# EAGLE board charging_1batt (EAGLE 8.2.0)
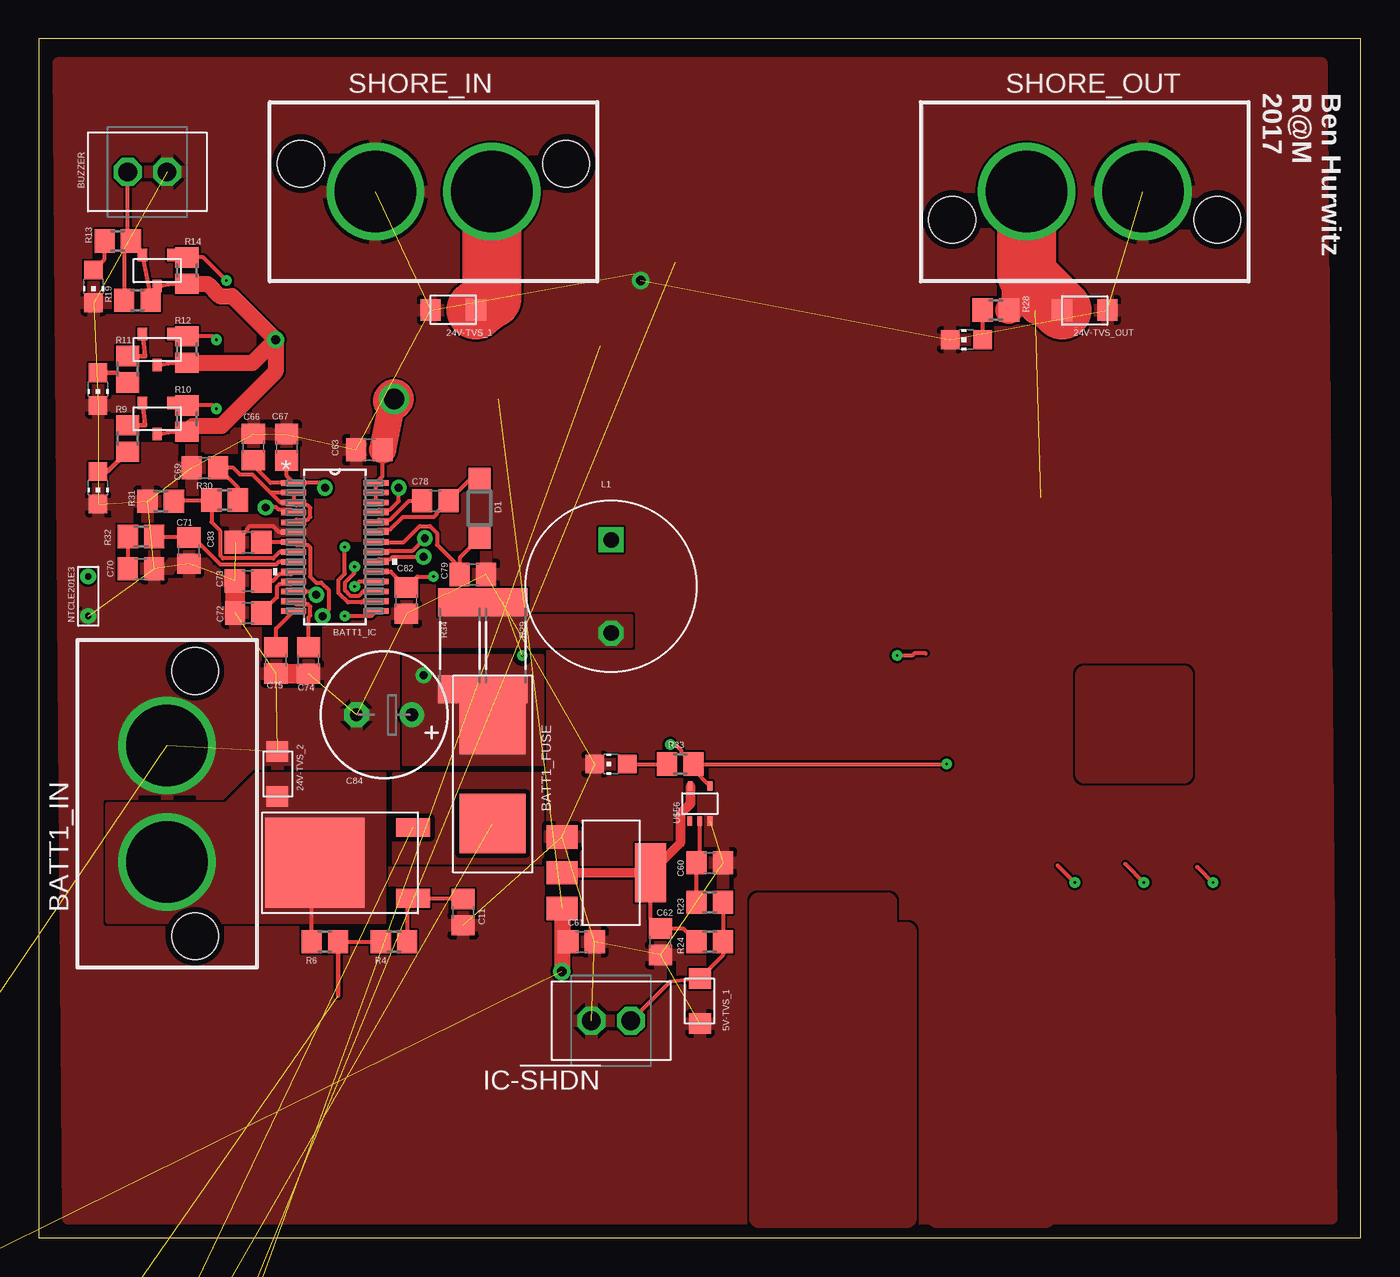
[diagram p0: board, top side]
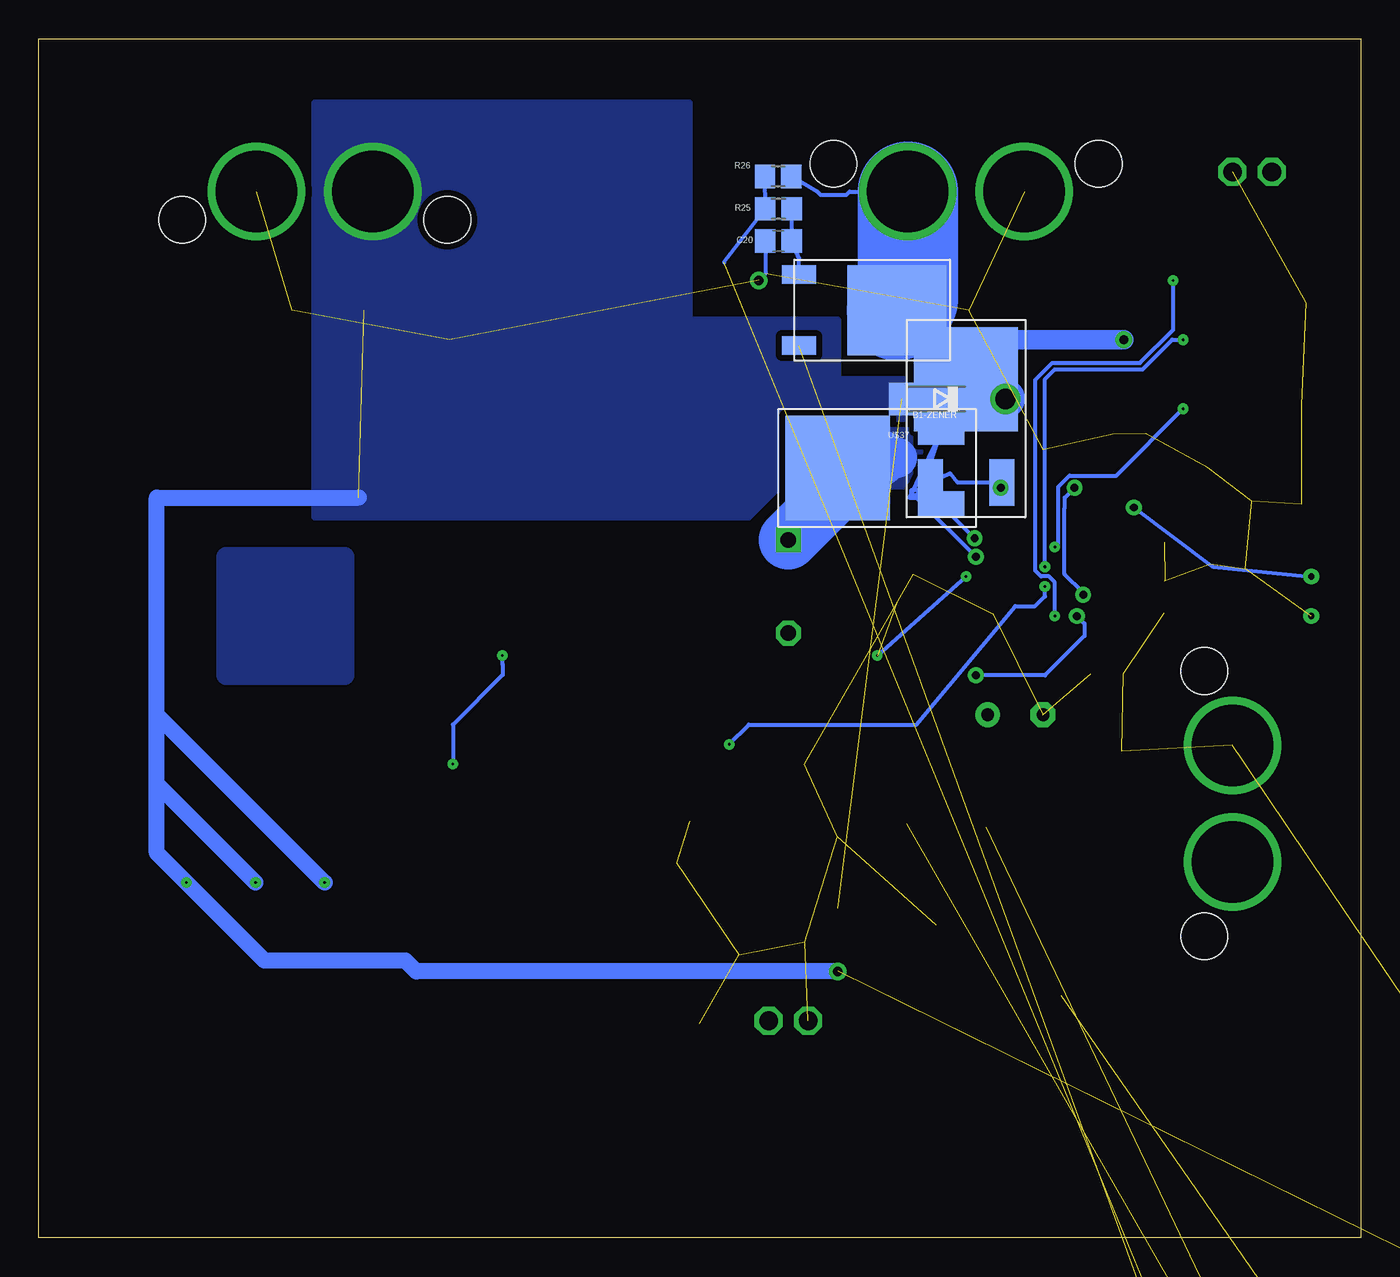
[diagram p1: board, bottom side, seen from below]

Size 85.07 x 77.14 mm. Coordinates in mm from the lower left corner, seen from the top.
Outline: 0,0 85.07,0 85.07,77.14 0,77.14 0,0
Copper layers (1*16): Top 0.0356mm / dielectric 1.5011mm / Bottom 0.0356mm
Design rules "OshPark *": minimum track width 6mil, minimum drill 7mil, track to track 6mil, track to pad 6mil, pad to pad 6mil, via to via 6mil, smd to smd 6mil, copper to edge 15mil, drill to drill 6mil, minimum pad ring 12mil, minimum via ring 10mil, stop-mask expansion 6mil, vias tented up to drill 0mil, thermal gap 10mil

## Footprints (pad centres in the part's own frame; a part is rotated, then mirrored left to right if it is on the bottom)
DO-219AB = smd 1.3 x 1.4: P$1 -1.45,0; P$2 1.45,0
DPAK = smd 3 x 1.6: 1 1.57,-2.3; 3 1.57,2.3 | smd 6.7 x 6.7: TAB -5.08,0
SOD106-R = smd 1.6 x 2.1: A 2.25,0; C -2.25,0
154-OMNI-BLOK = smd 3.81 x 4.242: P$1 -3.188,0; P$2 3.188,0
QSOP28 = smd 1.6 x 0.356: 1 -2.654,4.128; 2 -2.654,3.493; 3 -2.654,2.857; 4 -2.654,2.223; 5 -2.654,1.587; 6 -2.654,0.953; 7 -2.654,0.318; 8 -2.654,-0.318; 9 -2.654,-0.953; 10 -2.654,-1.587; 11 -2.654,-2.223; 12 -2.654,-2.857; 13 -2.654,-3.493; 14 -2.654,-4.128; 15 2.654,-4.128; 16 2.654,-3.493; 17 2.654,-2.857; 18 2.654,-2.223; 19 2.654,-1.587; 20 2.654,-0.953; 21 2.654,-0.318; 22 2.654,0.318; 23 2.654,0.953; 24 2.654,1.587; 25 2.654,2.223; 26 2.654,2.857; 27 2.654,3.493; 28 2.654,4.128
SUPERSABRE_2CIRCUIT = drill 5.25: P$1 -3.747,0; P$2 3.747,0 | hole 2.997: -8.534,-1.803; 8.534,-1.803
1X02 = drill 1.016: 1 -1.27,0; 2 1.27,0
KK254_VERT_2PIN = drill 1.2 octagon: P$1 1.27,0; P$2 -1.27,0
C0805 = smd 1.3 x 1.5: 1 -0.85,0; 2 0.85,0
E3,5-8 = drill 0.813 pad 1.6: + -1.778,0 | drill 0.813 pad 1.6 octagon: - 1.778,0
SOD123 = smd 1.4 x 1.4: A 1.9,0; C -1.9,0
L6100 = drill 1 square: P$1 -3,0 | drill 1 octagon: P$2 3,0
CHIP-LED0805 = smd 1.2 x 1.2: A 0,-1.05; C 0,1.05
R0805 = smd 1.3 x 1.5: 1 -0.85,0; 2 0.85,0
R2512 = smd 1.8 x 3.2: 1 -2.8,0; 2 2.8,0
SOT-346-3/S-MINI = smd 0.6 x 0.8: P$1 -0.95,-1; P$2 0.95,-1; P$3 0,1
TO252-3 = smd 1.2 x 2.2: 1 -2.28,-6.3; 3 2.28,-6.3 | smd 5.8 x 6.4: TAB 0,0
2-0.3MM-LEADS = drill 0.4: P$1 -1.27,0; P$2 1.27,0
TSSOP5 = smd 0.3 x 0.6: P$1 -0.65,-1.125; P$2 0,-1.125; P$3 0.65,-1.125; P$4 0.65,1.125; P$5 -0.62,1.125
SOT-223 = smd 1.5 x 2: P$1 -2.3,-3.15; P$2 0,-3.15; P$3 2.3,-3.15 | smd 3.8 x 2: P$4 0,2.54

## Placement (x,y rotation side)
5V-TVS_1  VTVS  [DO-219AB]  42.55,15.24 90 top
24V-TVS_1  VTVS  [DO-219AB]  26.67,59.69 0 top
24V-TVS_2  VTVS  [DO-219AB]  15.35,29.84 270 top
24V-TVS_OUT  VTVS  [DO-219AB]  67.31,59.69 180 top
B1-HFET  STD95N2LH5  [DPAK]  25.4,50.17 270 bottom
B1-ZENER  [SOD106-R]  27.31,53.98 180 bottom
BATT1_FUSE  4A  [154-OMNI-BLOK]  29.21,29.84 90 top
BATT1_IC  MAX1737  [QSOP28]  19.05,44.45 0 top
BATT1_IN  2_SUPERSABRE  [SUPERSABRE_2CIRCUIT]  8.26,27.94 90 top
BATT_ON/OFF  [1X02]  -13.33,-33.02 0 top  (outside the outline)
BUZZER  KK254_VERT_2PIN22-29-2021  [KK254_VERT_2PIN]  6.99,68.58 180 top
C1  10u  [C0805]  -20.95,-10.16 0 top  (outside the outline)
C2  0.1u  [C0805]  -20.95,-15.87 0 top  (outside the outline)
C3  1n  [C0805]  -20.95,-21.59 0 top  (outside the outline)
C11  2.2u  [C0805]  27.31,20.95 270 top
C20  2.2u  [C0805]  37.47,64.14 180 bottom
C60  1u  [C0805]  43.18,24.13 0 top
C61  10u  [C0805]  34.92,19.05 0 top
C62  10u  [C0805]  40,19.05 270 top
C63  0.1u  [C0805]  21.27,50.71 180 top
C66  2.2u  [C0805]  13.82,50.89 90 top
C67  2.2u  [C0805]  15.95,50.86 90 top
C69  1u  [C0805]  10.69,49.55 180 top
C70  0.1u  [C0805]  6.57,43.05 0 top
C71  1n  [C0805]  9.66,44.21 270 top
C72  47n  [C0805]  13.48,40.21 180 top
C73  47n  [C0805]  13.47,42.27 180 top
C74  1n  [C0805]  17.36,37.14 270 top
C75  1n  [C0805]  15.27,37.15 270 top
C78  0.1u  [C0805]  25.52,47.42 0 top
C79  0.1u  [C0805]  27.93,42.69 0 top
C82  0.1u  [C0805]  23.66,41 270 top
C83  0.1u  [C0805]  13.47,44.75 180 top
C84  120u  [E3,5-8]  22.22,33.66 180 top
CHARGE-CURRENT  [1X02]  -13.33,-49.53 0 top  (outside the outline)
D1  [SOD123]  28.37,46.94 270 top
IC-!SHDN!  KK254_VERT_2PIN22-29-2021  [KK254_VERT_2PIN]  36.83,13.97 0 top
L1  10uH  [L6100]  36.83,41.91 270 top
LED1  FASTCHG  [CHIP-LED0805]  3.81,48.26 180 top
LED2  FULLCHG  [CHIP-LED0805]  3.81,54.61 180 top
LED3  FAULT  [CHIP-LED0805]  3.52,61.21 180 top
LED7  Shore Power  [CHIP-LED0805]  59.69,57.78 90 top
LED8  CHARGING  [CHIP-LED0805]  36.83,30.48 90 top
R4  43k  [R0805]  22.86,19.05 180 top
R6  4.3k  [R0805]  18.42,19.05 0 top
R9  1.2k  [R0805]  5.71,51.44 90 top
R10  50k  [R0805]  9.53,52.7 270 top
R11  1.2k  [R0805]  5.71,55.88 90 top
R12  50k  [R0805]  9.53,57.15 270 top
R13  510  [R0805]  5.08,64.14 0 top
R14  50k  [R0805]  9.53,62.23 270 top
R19  680  [R0805]  6.35,60.33 0 top
R23  510  [R0805]  43.18,21.59 180 top
R24  6.8k  [R0805]  43.18,19.05 180 top
R25  43k  [R0805]  37.47,66.21 180 bottom
R26  4.3k  [R0805]  37.49,68.29 180 bottom
R28  1.5k  [R0805]  61.59,59.69 0 top
R29  100m  [R2512]  29.85,38.1 90 top
R30  ~50k  [R0805]  11.96,47.47 180 top
R31  ~50k  [R0805]  7.84,47.4 0 top
R32  10k  [R0805]  6.58,45.13 0 top
R33  330  [R0805]  41.28,30.48 0 top
R34  100m  [R2512]  27.31,38.1 90 top
SHORE_CURR  [1X02]  -13.33,-82.55 0 top  (outside the outline)
SHORE_IN  2_SUPERSABRE  [SUPERSABRE_2CIRCUIT]  25.4,67.31 180 top
SHORE_ON/OFF  [1X02]  -13.33,-66.04 0 top  (outside the outline)
SHORE_OUT  2_SUPERSABRE  [SUPERSABRE_2CIRCUIT]  67.31,67.31 0 top
U$7  SSM3J353F  [SOT-346-3/S-MINI]  7.62,52.7 180 top
U$8  SSM3J353F  [SOT-346-3/S-MINI]  7.62,57.15 180 top
U$9  SSM3J353F  [SOT-346-3/S-MINI]  7.62,62.23 180 top
U$16  IPD50P04P4-13  [TO252-3]  17.78,24.13 90 top
U$19  IPD50P04P4-13  [TO252-3]  29.85,59.69 270 bottom
U$37  STD95N2LH5  [DPAK]  28.57,49.53 0 bottom
U$40  NTCLE201E3  [2-0.3MM-LEADS]  3.18,41.27 270 top
U$56  74LVC1G14  [TSSOP5]  42.55,27.94 0 top
U$57  NCP1117  [SOT-223]  36.83,23.5 270 top

## Library data of the parts
5V-TVS_1 24V-TVS_1 24V-TVS_2 24V-TVS_OUT B1-ZENER D1 = diode
B1-HFET U$7-U$9 U$37 = transistors
BATT1_FUSE = littelfuse
BATT1_IC = maxim
BATT1_IN BUZZER IC-!SHDN! SHORE_IN SHORE_OUT = molex
BATT_ON/OFF CHARGE-CURRENT SHORE_CURR SHORE_ON/OFF = pinhead
C1-C3 C11 C20 C60-C63 C66 C67 C69-C75 C78 C79 C82-C84 L1 R4 R6 R9-R14 R19 R23-R26 R28-R34 = resistor
LED1-LED3 LED7 LED8 = led
U$16 U$19 = transistor-power
U$40 = vishay
U$56 = NXP
U$57 = ONSemi

## Nets
!SHDN!: BATT1_IC.18 R33.2 U$56.P$4
BATT1_P: 24V-TVS_2.P$2 BATT1_IN.P$1 R6.1 U$16.TAB
BATT_1: BATT1_FUSE.P$2 BATT1_IC.7 C83.1 C84.+ R29.1 R34.1
CS_1: BATT1_IC.19 C82.1 L1.P$2 R29.2 R34.2
FET-G_1: C11.1 R4.1 U$16.1
GND: 5V-TVS_1.P$1 24V-TVS_1.P$1 24V-TVS_2.P$1 24V-TVS_OUT.P$1 BATT1_IC.6 BATT1_IN.P$2 BATT_ON/OFF.2 BUZZER.P$2 C1.2 C2.2 C3.2 C11.2 C20.2 C60.2 C61.2 C62.2 C63.2 C66.2 C67.2 C69.2 C70.2 C71.2 C72.2 C73.2 C74.2 C75.2 C79.2 C82.2 C83.2 C84.- IC-!SHDN!.P$2 LED1.C LED2.C LED3.C LED7.C LED8.C R31.1 SHORE_IN.P$2 SHORE_ON/OFF.1 SHORE_OUT.P$2 U$40.P$2 U$56.P$3 U$57.P$1
N$1: CHARGE-CURRENT.2 U$16.3
N$2: LED1.A R9.1
N$3: BATT1_FUSE.P$1 CHARGE-CURRENT.1
N$4: SHORE_CURR.1 U$19.3
N$12: LED3.A R13.1
N$22: LED2.A R11.1
N$23: R9.2 U$7.P$2
N$24: BATT1_IC.16 R10.1 U$7.P$1
N$26: R11.2 U$8.P$2
N$27: BATT1_IC.17 R12.1 U$8.P$1
N$29: BUZZER.P$1 R13.2 R19.1
N$30: R19.2 U$9.P$2
N$31: BATT1_IC.15 R14.1 U$9.P$1
N$35: LED7.A R28.1
N$40: B1-HFET.TAB B1-ZENER.C BATT1_IC.26 BATT1_IC.27 BATT1_IC.28 C63.1
N$47: C20.1 R25.1 U$19.1
N$49: C60.1 R23.2 U$56.P$2
N$50: 5V-TVS_1.P$2 IC-!SHDN!.P$1 R23.1 R24.1
N$51: R25.2 R26.2 SHORE_ON/OFF.2
N$52: BATT_ON/OFF.1 R4.2 R6.2
N$54: C62.1 R24.2 U$56.P$5 U$57.P$2 U$57.P$4
N$57: LED8.A R33.1
N$62: BATT1_IC.8 R30.2 R31.2
N$64: C70.1 R32.1
N$65: BATT1_IC.1 BATT1_IC.12 C66.1 C67.1
N$67: BATT1_IC.9 C71.1 R32.2
N$68: BATT1_IC.2 BATT1_IC.3 BATT1_IC.5 C69.1 R30.1
N$69: BATT1_IC.11 C72.1
N$70: BATT1_IC.10 C73.1
N$71: BATT1_IC.13 C74.1
N$72: BATT1_IC.14 C75.1
N$75: BATT1_IC.24 C78.1
N$76: BATT1_IC.23 C78.2 D1.C
N$79: BATT1_IC.21 U$37.1
N$80: B1-HFET.1 BATT1_IC.25
N$81: B1-HFET.3 L1.P$1 U$37.TAB
N$82: BATT1_IC.20 U$37.3
N$83: BATT1_IC.22 C79.1 D1.A
N$84: BATT1_IC.4 U$40.P$1
V_SHORE: 24V-TVS_OUT.P$2 B1-ZENER.A C1.1 C2.1 C3.1 C61.1 R10.2 R12.2 R14.2 R28.2 SHORE_CURR.2 SHORE_OUT.P$1 U$7.P$3 U$8.P$3 U$9.P$3 U$57.P$3
VIN: 24V-TVS_1.P$2 R26.1 SHORE_IN.P$1 U$19.TAB

## Tracks (layer width: path | path; a pad name or v marks a point on that pad's centre or on a via)
!SHDN!  (via drill 0.18)
  Top 0.254: U$56.P$4 42.12,30.14 R33.2 | 57.09,37.61 56.35,37.61 56.21,37.47 v55.25,37.47 | R33.2 v58.42,30.48 | R33.2 41.35,31.25 41.35,31.35 40.95,31.75 v40.64,31.75 | 20.97,42.23 BATT1_IC.18 20.64,42.23 v20.32,41.91
  Bottom 0.254: v55.25,37.47 55.25,36.91 55.22,36.89 55.22,36.22 58.42,33.02 v58.42,30.48 | v40.64,31.75 39.37,33.02 28.57,33.02 22.22,40.64 20.96,40.64 20.32,41.27 v20.32,41.91
BATT1_P
  Top 0.254: R6.1 17.57,23.91 U$16.TAB
  pour Top (isolate 0.305, no thermals): 4.45,27.94 12.07,27.94 13.97,29.84 22.22,29.84 22.22,20.32 4.45,20.32
BATT2_P
  pour Top (isolate 0.305): 46.36,21.59 54.61,21.59 54.61,19.69 55.88,19.69 55.88,1.27 46.36,1.27
BATT_1  (via drill 0.51)
  Top 0.254: 14.5,44.77 C83.1 14.34,44.77 BATT1_IC.7 | 15.66,44.77 BATT1_IC.7 | BATT1_IC.7 16.57,44.59 17.31,44.59 17.47,44.43 17.47,42.57 17.45,42.55 17.83,42.16 18.18,42.16 18.64,41.7 18.64,40.39 v18.26,40.01
  Bottom 0.254: v18.26,40.01 17.78,39.52 17.78,38.73 20.32,36.2 v24.77,36.2
  pour Top (isolate 0.305, no thermals): 23.5,37.47 32.39,37.47 32.39,30.48 23.5,30.48
CS_1  (via drill 0.18)  (1 unrouted)
  Top 0.254: BATT1_IC.19 22.65,42.86 C82.1 24.36,42.55 v25.4,42.55
  Top 1.27: L1.P$2 36.79,38.95
  Bottom 0.254: v25.4,42.55 v31.11,37.47
  pour Top (isolate 0.305, no thermals): 26.04,38.1 38.1,38.1 38.1,40.01 26.04,40.01
CS_2
  pour Top (isolate 0.305): 67.31,29.84 67.31,36.2 73.66,36.2 73.66,29.84
FET-D_1
  pour Top (isolate 0.305): 22.86,29.84 32.39,29.84 32.39,24.13 22.86,24.13
FET-G_1
  Top 0.254: 23.71,21.48 R4.1 | 23.71,21.48 U$16.1 | C11.1 24.04,21.8 23.71,21.48
GND  (via drill 0.6)  (39 unrouted)
  Top 0.254: BATT1_IC.6 15.47,45.4 15.09,45.78 13.56,45.78 13.39,45.62 13.39,45.52 C83.2
  Top 1.27: C74.2 C75.2 | C72.2 C73.2
  Bottom 0.254: C20.2 38.31,62.02 v38.73,61.59
  pour Top (isolate 0, rank 6): 1.91,1.27 83.19,1.27 82.55,75.56 1.27,75.56
  pour Top (isolate 0.305): 57.78,1.27 57.78,17.15 64.77,17.15 64.77,1.27
  pour Top (no thermals): 13.97,34.93 16.51,34.93 16.51,30.48 13.97,30.48
  pour Top (isolate 0.305, no thermals): 16.51,30.48 12.07,30.48 10.16,28.58 4.45,28.58 3.18,29.84 3.18,40.64 8.26,40.64 8.26,35.56 8.89,34.93 16.51,34.93
L-IN_2
  pour Bottom: 65.41,43.81 73.02,43.81 73.02,36.2 65.41,36.2
N$1  (1 unrouted)
N$2
  Top 0.305: LED1.A 4.44,49.31 R9.1
N$3  (1 unrouted)
N$4  (1 unrouted)
N$12
  Top 0.254: LED3.A 4.23,62.97 R13.1
N$22
  Top 0.305: LED2.A 5.09,55.66 R11.1
N$23
  Top 0.305: R9.2 6.85,52.28 U$7.P$2
N$24  (via drill 0.18)
  Top 0.254: U$7.P$1 8.6,53.56 R10.1 11.21,53.56 v11.43,53.34 | BATT1_IC.16 20.82,40.96 20.75,40.88 19.89,40.88 19.29,41.48 19.29,42.34 19.68,42.73 v19.68,44.45
  Bottom 0.254: v19.68,44.45 19.47,44.67 19.47,48.32 18.74,49.05 15.72,49.05 v11.43,53.34
N$26
  Top 0.305: R11.2 6.85,56.73 U$8.P$2
N$27  (via drill 0.18)
  Top 0.254: U$8.P$1 8.6,58 R12.1 11.21,58 v11.43,57.78 | BATT1_IC.17 20.88,41.59 20.58,41.29 20.06,41.29 19.7,41.65 19.7,42.17 20.32,42.79 v20.32,43.18
  Bottom 0.254: v20.32,43.18 20.32,55.25 19.68,55.88 14.03,55.88 12.12,57.78 v11.43,57.78
N$29
  Top 0.254: R19.1 5.5,63.7 R13.2 5.71,64.35 BUZZER.P$1
N$30
  Top 0.254: R19.2 7.27,60.39 U$9.P$2
N$31  (via drill 0.18)
  Top 0.254: U$9.P$1 8.6,63.08 R14.1 10.58,63.08 v12.07,61.59 | BATT1_IC.15 21.39,40.01 v19.68,40.01
  Bottom 0.254: v19.68,40.01 19.68,42.18 20.06,42.56 20.58,42.56 20.94,42.92 20.94,55.2 19.85,56.29 14.2,56.29 12.07,58.42 v12.07,61.59
N$35
  Top 0.254: LED7.A R28.1
N$40  (via drill 1.3)
  Top 0.254: C63.1 22.12,49 BATT1_IC.28 BATT1_IC.27 BATT1_IC.26
  Top 1.778: C63.1 22.76,53.87
  Top 2.54: 22.76,53.87 v22.86,53.98
  Bottom 2.54: B1-HFET.TAB 24.72,53.64 B1-ZENER.C v22.86,53.98
N$47
  Bottom 0.254: U$19.1 36.14,63.03 C20.1 R25.1
N$49
  Top 0.254: R23.2 C60.1 | 42.33,24.5 C60.1 | C60.1 42.55,24.34 U$56.P$2
N$50
  Top 0.254: R23.1 R24.1 44.03,18.18 5V-TVS_1.P$2 40.64,16.51 IC-!SHDN!.P$1
N$51  (1 unrouted)
  Bottom 0.254: R26.2 R25.2 40.97,62.75
N$52  (1 unrouted)
  Top 0.254: R6.2 R4.2
  Top 0.305: 19.27,15.57 R6.2
N$54
  Top 0.254: R24.2 41.48,19.9 C62.1 39.37,20.54 U$57.P$4
  Top 0.61: U$57.P$2 U$57.P$4 41.29,25.41 41.29,27.3 41.92,27.94 U$56.P$5
N$57
  Top 0.254: LED8.A R33.1
N$62
  Top 0.254: BATT1_IC.8 15.5,44.13 15.09,43.72 11.86,43.72 11.69,43.89 11.69,45.46 11.11,46.04 R30.2 8.76,47.47 R31.2
N$64
  Top 0.254: R32.1 5.73,43.06 C70.1
N$65  (via drill 0.51)
  Top 0.254: BATT1_IC.1 14.9,48.58 13.82,49.67 C66.1 | BATT1_IC.1 15.95,49.02 C67.1 | BATT1_IC.12 17.64,41.59 v17.86,41.38 | v18.42,48.26 18.1,48.58 BATT1_IC.1
  Bottom 0.254: v17.86,41.38 17.86,41.51 19.06,42.71 19.06,46.95 19.05,46.96 19.05,47.62 v18.42,48.26
N$67
  Top 0.254: 16.29,43.4 BATT1_IC.9 15.44,43.5 15.26,43.32 11.69,43.32 9.94,45.06 | C71.1 7.5,45.06 R32.2 | 9.94,45.06 C71.1 | 9.94,45.06 C71.1
N$68
  Top 0.254: 14.92,47.94 BATT1_IC.2 BATT1_IC.3 | BATT1_IC.3 15.56,47.31 14.92,47.94 | BATT1_IC.5 16.57,46.22 17.31,46.22 17.47,46.38 17.47,46.97 17.31,47.13 16.57,47.13 BATT1_IC.3 | 14.92,47.94 13.76,49.11 12.95,49.11 12.51,49.55 C69.1 12.81,48.28 R30.1
N$69
  Top 0.254: BATT1_IC.11 16.22,42.05 15.48,42.05 15.32,41.89 15.32,41.2 C72.1
N$70
  Top 0.254: BATT1_IC.10 16.22,42.69 15.48,42.69 15.06,42.27 C73.1
N$71
  Top 0.254: BATT1_IC.13 16.57,40.78 17.31,40.78 17.47,40.62 17.47,40.03 17.36,39.92 C74.1
N$72
  Top 0.254: C75.1 15.27,39.19 BATT1_IC.14
N$75
  Top 0.254: BATT1_IC.24 21.88,46.22 22.62,46.22 23.83,47.42 C78.1
N$76
  Top 0.254: 26.73,47.06 C78.2 | BATT1_IC.23 21.88,45.58 22.62,45.58 23.43,46.39 25.44,46.39 25.6,46.56 25.6,46.65 C78.2 | C78.2 27.78,48.84 D1.C
N$79  (via drill 0.51)
  Top 0.254: BATT1_IC.21 22.5,44.13 22.59,44.22 24.06,44.22 v24.84,45.01
  Bottom 0.254: v24.84,45.01 27.6,47.76 U$37.1
N$80  (via drill 0.51)
  Top 0.254: BATT1_IC.25 21.88,46.85 22.62,46.85 23.17,47.39 v23.17,48.26
  Bottom 0.254: v23.17,48.26 23.62,48.6 25.93,48.6 26.41,49.19 B1-HFET.1
N$81
  Bottom 2.54: U$37.TAB 29.81,50.2 29.85,50.17 31.11,50.17
  Bottom 3.81: 31.11,50.17 31.57,50.17 L1.P$1
  pour Bottom (isolate 0.305, rank 2, no thermals): 27.31,48.26 30.48,48.26 30.48,52.07 26.04,52.07 26.04,49.53 27.31,49.53
N$82  (via drill 0.51)
  Top 0.254: BATT1_IC.20 21.88,43.67 22.62,43.67 22.76,43.81 v24.77,43.81
  Bottom 0.254: 28.57,47.62 v24.77,43.81 | 28.57,47.62 28.9,47.95 28.9,48.13 28.25,48.13 | 28.25,48.13 U$37.3 29.04,47.62 28.57,47.62 | 28.25,48.13 28.57,47.81 28.57,47.62
N$83
  Top 0.254: BATT1_IC.22 23.49,44.77 24.52,45.79 25.17,45.79 25.63,45.33 25.63,44.59 27.08,43.14 C79.1 27.08,43.75 D1.A
N$84  (via drill 0.51)
  Top 0.254: BATT1_IC.4 16.22,46.85 15.44,46.85 15.3,46.99 v14.61,46.99
  Bottom 0.254: v14.61,46.99 9.53,43.18 U$40.P$1
V_SHORE  (via drill 0.18, 0.6)  (6 unrouted)
  Top 0.254: 65.58,23.95 v66.67,22.86 | 69.92,24.06 v71.12,22.86 | 74.55,23.88 74.55,23.87 v75.56,22.86 | U$7.P$3 8.6,51.86 R10.2 | U$8.P$3 8.6,56.3 R12.2 | U$9.P$3 8.6,61.38 R14.2 | U$57.P$3 34.08,20.8 C61.1
  Top 1.016: R10.2 9.92,52.25 11.75,52.25 15.24,55.73 v15.24,57.78 | R12.2 13.75,56.3 v15.24,57.78 | v15.24,57.78 12.43,60.59 11.65,60.59 10.86,61.38 R14.2 | U$57.P$3 33.68,17.17 v33.66,17.15
  Top 1.778: R28.2 62.86,60.11 62.86,60.96 64.13,59.69 24V-TVS_OUT.P$2
  Top 3.81: SHORE_OUT.P$1 63.56,61.99 24V-TVS_OUT.P$2
  Bottom 0.254: v75.56,22.86 77.47,24.77
  Bottom 1.016: v33.66,17.15 60.78,17.15 61.47,17.84 70.54,17.84 77.47,24.77 77.47,29.21 | 77.47,29.21 77.47,33.66 | 77.47,33.66 77.47,47.62 64.48,47.62 | v71.12,22.86 77.47,29.21 | v66.67,22.86 77.47,33.66
  Bottom 1.27: B1-ZENER.A 28.02,53.98 24.21,57.78 v15.24,57.78
  pour Bottom (isolate 0.406, no thermals): 28.57,55.25 28.57,52.7 33.02,52.7 39.37,46.36 67.31,46.36 67.31,73.03 43.18,73.03 43.18,59.06 33.66,59.06 33.66,55.25
VIN
  Top 3.81: SHORE_IN.P$1 29.15,60.44 24V-TVS_1.P$2
  Bottom 0.254: R26.1 34.97,67.31 34.77,67.11 33.1,67.11 32.9,67.31 SHORE_IN.P$1
  Bottom 6.452: SHORE_IN.P$1 29.15,60.39 U$19.TAB

## Text on the board
tPlace: Ben Hurwitz / R@M / 2017